# Altium PCB Extruder.PcbDoc
Units mm, origin at the board's own origin, x right, y up, seen from the top; angles counter-clockwise.
Board outline 78.23 x 77.34 mm, 2 copper layers (Top Layer, Bottom Layer); 31 components, 25 nets, 105 pads, 2 vias.
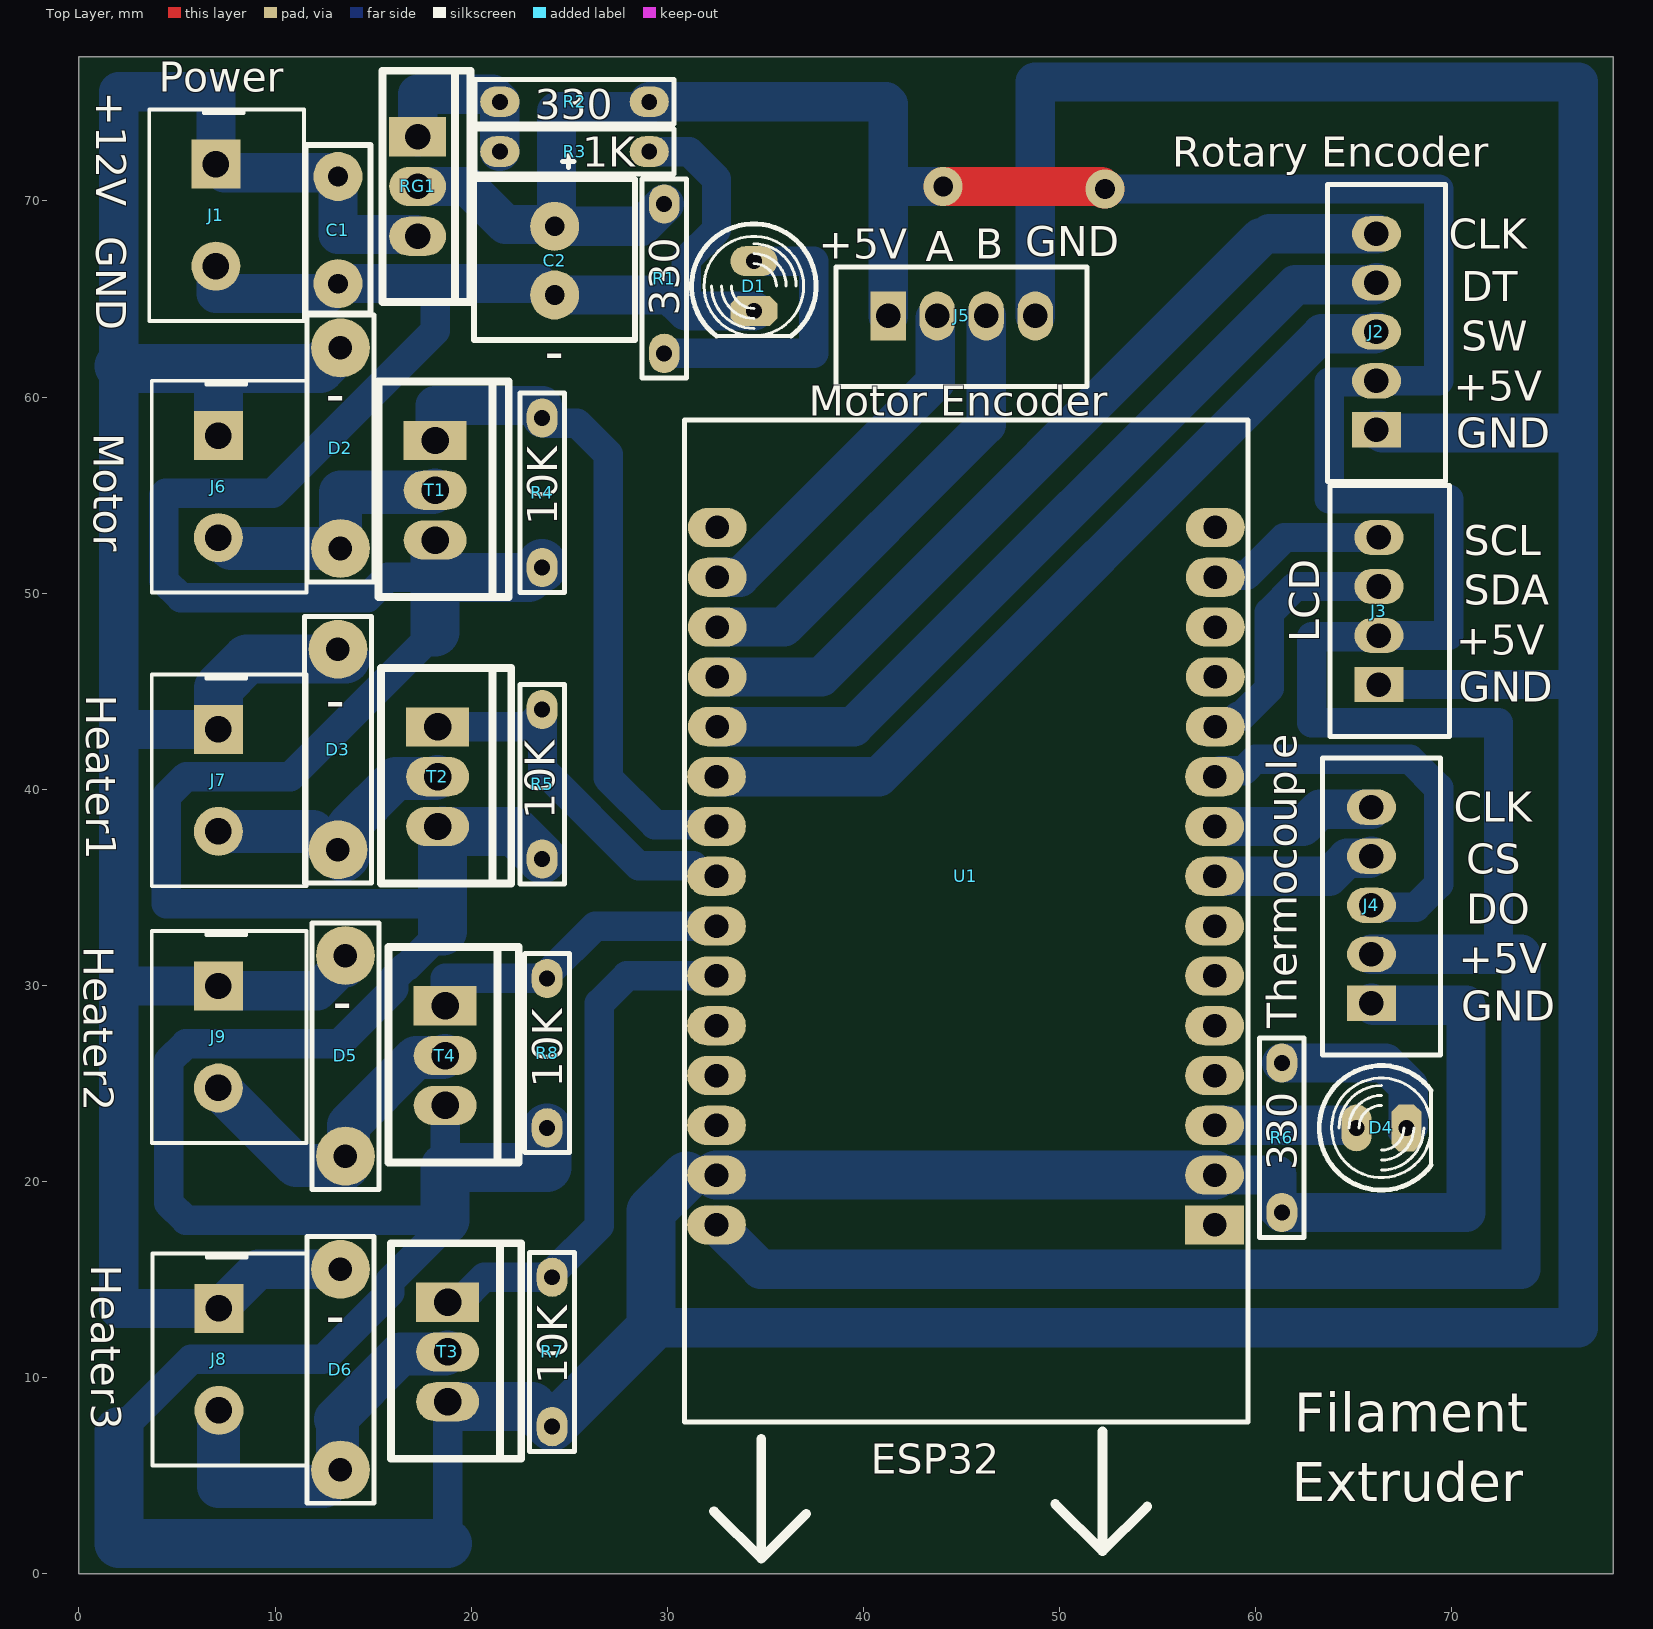
[diagram p0: Top Layer view]
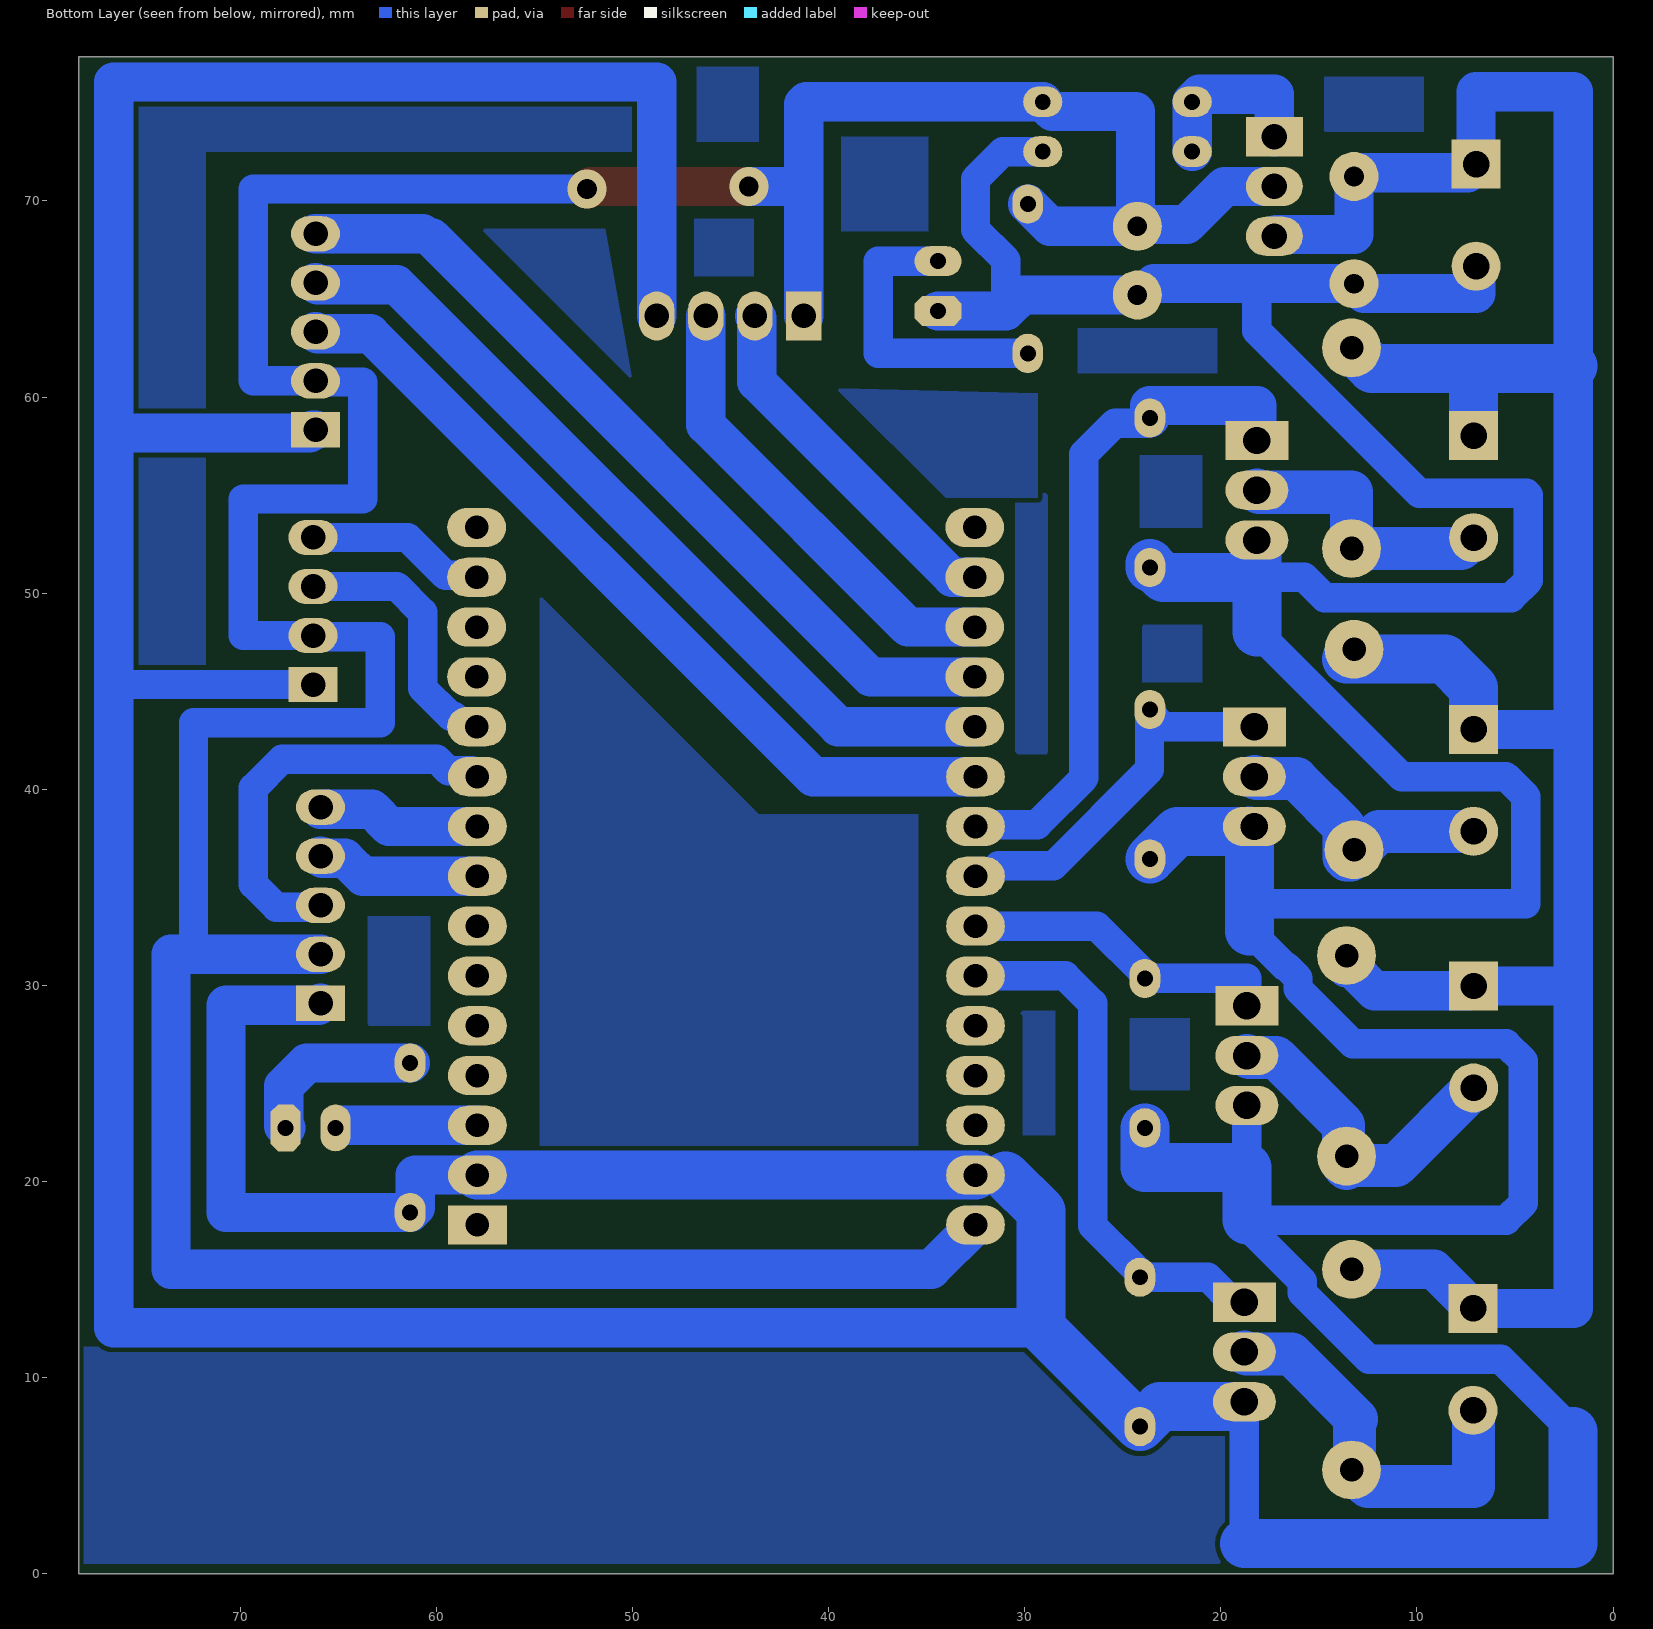
[diagram p1: Bottom Layer view, seen from below]

## Layer stack, top to bottom
Top Solder: solder mask 0.0102, Solder Resist, Dk 3.5
Top Layer: signal copper 0.0356
Dielectric 1: dielectric 0.32, FR-4, Dk 4.8
Bottom Layer: signal copper 0.0356
Bottom Solder: solder mask 0.0102, Solder Resist, Dk 3.5

## Board outline
0,0 78.232,0 78.232,77.343 0,77.343

## Design rules (kind name [scope] priority, off if disabled: settings)
Clearance [All] p1: gap=0.254 ignorepadtopadclearanceinfootprint=FALSE except(0: Arc-Hole Track-Hole SMDPad-Hole THPad-Hole Via-Hole Fill-Hole Poly-Hole Region-Hole Text-Hole)
PolygonConnect [All] p1: connectstyle=Relief reliefconductorwidth=0.254 reliefentries=4 polygonreliefangle="90 Angle" airgapwidth=0.254
RoutingVias [All] p1: holewidth=0.711 width=1.27 viastyle="Through Hole" minholewidth=0.711 minwidth=1.27 maxholewidth=0.711 maxwidth=1.27
SolderMaskExpansion [All] p1: expansion=0.102
Width [All] p1: maxlimit=3 minlimit=1 preferedwidth=1.5 minimp=50.000000 maximp=50.000000 favimp=50.000000
30 further rules are at their usual default settings.

## Components (designator, comment, footprint, x,y, rotation, side; value= is the part's Value field where it differs from the comment)
C1 "100nF" "CAP non" 13.208,68.666 r270 top
C2 "1uF" "CAP  pol" 24.357,67.207 r270 top
D1 "LED" "LED-05 R" 34.417,65.659 r270 top
D2 "1N4007" DO-41 13.335,57.277 r90 top
D3 "1N4007" DO-41 13.208,41.91 r90 top
D4 "LED" "LED-05 R" 66.421,22.733 r0 top
D5 "1N4007" DO-41 13.589,26.289 r90 top
D6 "1N4007" DO-41 13.335,10.287 r90 top
J1 "Power" CON 7.085,69.275 r270 top
J2 "Rotary Encoder" "Data Connnector 5 pins" 66.167,64.576 r180 top
J3 "LCD" "Data Connnector 4 pins" 66.294,51.589 r180 top
J4 "Thermocouple" "Data Connnector 5 pins" 65.913,35.333 r180 top
J5 "Motor Encoder" "Data Connnector 4 pins" 47.518,64.135 r90 top
J6 "Motor" CON 7.212,55.432 r270 top
J7 "Heater1" CON 7.212,40.453 r270 top
J8 "Heater3" CON 7.239,10.922 r270 top
J9 "Heater2" CON 7.212,27.365 r270 top
R1 "330" Resistor 29.845,66.04 r90 top
R2 "330" Resistor 25.273,75.057 r180 top
R3 "1K" Resistor 25.273,72.517 r180 top
R4 "10K" Resistor 23.622,55.118 r90 top
R5 "10K" Resistor 23.622,40.259 r90 top
R6 "330" Resistor 61.341,22.225 r90 top
R7 "10K" Resistor 24.13,11.303 r90 top
R8 "10K" Resistor 23.876,26.543 r90 top
RG1 "Adjustable Voltage Regulator" Regulator 17.272,73.279 r0 top
T1 "MOSFET" IRF540 18.161,57.785 r0 top
T2 "MOSFET" IRF540 18.288,43.18 r0 top
T3 "MOSFET" IRF540 18.796,13.843 r0 top
T4 "MOSFET" IRF540 18.669,28.956 r0 top
U1 "ESP32" ESP32 57.912,17.78 r180 top

## Footprints (in the part's own frame and the unit in brackets; to place one, negate y for a bottom-side part, rotate by r counter-clockwise, add the part's x,y. Pads: shape width x height; smd on the part's side, far side on the other; paste and mask are expansions set on the pad)
"CAP  pol" [mm]
  round 2.5 hole 1: 1(-1.5,-0.1) 2(2,-0.1)
  silkscreen extent -5.1,-4.2 4.3,4, body extent -3.8,-4.1 4.2,3.9, height 7
"CAP non" [mm]
  round 2.5 hole 1: 1(-2.581,0) 2(2.88,0)
  silkscreen extent -4.2,-1.65 4.4,1.65, body extent -2.79,-1.3 3.21,1.3, height 5.2
CON [mm]
  rect 2.5x2.5 hole 1.35: 1(-2.6,-0.1)
  round 2.5 hole 1.35: 2(2.6,-0.1)
  silkscreen extent -5.4,-3.5 5.4,4.4, body extent -5.08,-3.3 5.08,4.2, height 10
"Data Connnector 4 pins" [mm]
  rect 2.5x1.8 hole 1.25: 1(0,6.25)
  oval 2.5x1.8 hole 1.25: 2(0,3.75) 3(0,1.25) 4(0,-1.25)
  silkscreen extent -3.6,-3.9 2.5,8.9, body extent -3.45,-3.7 2.3,8.7, height 6.91
"Data Connnector 5 pins" [mm]
  rect 2.5x1.8 hole 1.25: 1(0,6.25)
  oval 2.5x1.8 hole 1.25: 2(0,3.75) 3(0,1.25) 4(0,-1.25) 5(0,-3.75)
  silkscreen extent -3.52,-6.26 2.5,8.88, body extent -3.39,-6.16 2.37,8.74, height 7.01
DO-41 [mm] "Diode, Axial; Body 5.2 x 2.7 mm (LxDia. max), Lead Dia. 0.86 mm (max)"
  round 3 hole 1.2: 1(-5,0) 2(5.23,0)
  silkscreen extent -6.7,-1.7 6.9,1.7, body extent -5.36,-1.27 5.56,1.3, height 2.55
ESP32 [mm]
  rect 3x2 hole 1.2: 1(0,0)
  oval 3x2 hole 1.2: 2(0,-2.54) 3(0,-5.08) 4(0,-7.62) 5(0,-10.16) 6(0,-12.7) 7(0,-15.24) 8(0,-17.78) 9(0,-20.32) 10(0,-22.86) 11(-0.04,-25.41) 12(-0.04,-27.95) 13(-0.04,-30.49) 14(-0.04,-33.03) 15(-0.04,-35.57) 16(25.36,-35.57) 17(25.36,-33.03) 18(25.36,-30.49) 19(25.36,-27.95) 20(25.36,-25.41) 21(25.4,-22.86) 22(25.4,-20.32) 23(25.4,-17.78) 24(25.4,-15.24) 25(25.4,-12.7) 26(25.4,-10.16) 27(25.4,-7.62) 28(25.4,-5.08) 29(25.4,-2.54) 30(25.4,0)
  silkscreen extent -1.7,-41.05 27.03,10.06, body extent -1.58,-40.97 26.92,9.96, height 15.2
IRF540 [mm]
  rect 3.2x2 hole 1.4: 1(0,0)
  oval 3.2x2 hole 1.4: 2(0,-2.54) 3(0,-5.08)
  silkscreen extent -2.89,-7.99 3.76,3, body extent -2.79,-7.86 3.62,2.81, height 22.92
"LED-05 R" [mm] "Light emitting diode dia 5mm red color"
  oct 1.524x2.4 hole 0.813: 1(1.27,0)
  oval 1.524x2.4 hole 0.813: 2(-1.27,0)
  silkscreen extent -3.17,-3.17 2.54,3.17, body extent -2.98,-3.01 2.44,3.01, height 12.31
Regulator [mm]
  rect 2.9x2 hole 1.3: 1(0,0)
  oval 2.9x2 hole 1.3: 2(0,-2.54) 3(0,-5.08)
  silkscreen extent -1.8,-8.44 2.7,3.36, body extent -1.75,-8.48 2.65,3.4, height 20.11
Resistor [mil]
  oval 78.74x62 hole 32: 1(-150,0) 2(150,0)
  silkscreen extent -200,-45 200,45, body extent -159,-39 159,39, height 79

## Part data
C1: library part "Cap non"
C2: library part "Cap pol"
D2 D3 D5 D6: library part Diode
J1 J6 J7 J8 J9: library part 1935161, "Conn Terminal Blocks 2 POS 5mm Solder ST Thru-Hole 16A", Color=Green, Current=18A, Current Rating=17.5A, Flammability Rating="UL94 V-0", Manufacturer 1="Phoenix Contact", Max Current Rating=16A, Max Supply Voltage=250V, Package Quantity=250, Supplier Part Number 1=277-1667-ND, Voltage=300V, Voltage Rating (DC)=320V, Approvals=UL, ComponentLink1Description=https://datasheet.ciiva.com/15169/getdatasheetpartid-177903-15169663.pdf?src-supplier=Verical, ComponentLink1URL=https://datasheet.ciiva.com/15169/getdatasheetpartid-177903-15169663.pdf?src-supplier=Verical, ComponentLink2Description=https://datasheet.ciiva.com/16047/1935161-16047247.pdf?src-supplier=Onlinecomponents.com, ComponentLink2URL=https://datasheet.ciiva.com/16047/1935161-16047247.pdf?src-supplier=Onlinecomponents.com, ComponentLink3Description=https://datasheet.ciiva.com/824/combiconcompact5-0mmseries-824222.pdf?src-supplier=Digi-Key, ComponentLink3URL=https://datasheet.ciiva.com/824/combiconcompact5-0mmseries-824222.pdf?src-supplier=Digi-Key, Connector Type=Screw, Contact Material=Copper,Tin, Depth=9mm, Height=11.3mm, Housing Color=Green, Housing Material=Polyamide, Insulation Material=Nylon, Lead Free="Lead Free", Length=9mm, Manufacturer Part Number 1=1935161, Material=Nylon, Mount="Through Hole", Number of Circuits=2, Number of Contacts=2, Number of Levels=1, Number of Pins=2, Number of Poles=2, Number of Positions=2, Number of Positions Per Level=2, Number of Rows=1, Orientation=Straight, Packaging=Bulk, Pitch=5mm, Pricing 1="1=0.43000, 10=0.41100, 50=0.39280, 100=0.38200, 250=0.35700, 500=0.32844, 1000=0.30350 (USD)", Radiation Hardening=No, REACH SVHC=Unknown, RoHS=Yes, Stock 1=59845, Supplier 1=Digi-Key, Termination=Solder, Voltage Rating=250V, Weight=0.067021oz, Width=14.9mm, Wire/Cable Gauge=26AWG, Wire Gauge (Max)=26AWG, Wire Gauge (Min)=12AWG
J2 J4: library part "Data Connector 5 pins"
J3 J5: library part "Data Connector 4 pin"
R1 R2 R3 R4 R5 R6 R7 R8: library part Resistor
RG1: library part LM350
T1 T2 T3 T4: library part IRF540

## Via types
v1: diameter 2, hole 1, Top Layer to Bottom Layer, 2 vias

## Nets (pads, with @x,y where several pads share a name; then routed paths per layer and width w, separated by ;. In a path a pad name is that pad's centre, name@x,y a point inside that pad or via, vN(x,y) a via of type N, cw(c..) or ccw(c..) an arc to the next point about the centre after c; other vN are vias at no path point)
+5V: C2.1 J2.2 J3.2 J4.2 J5.1 R1.2 R2.1 RG1.2 U1.30 | length 208.7
  Top Layer w2: v1(44.069,70.739) 52.143,70.739 52.27,70.612 v1(52.324,70.612)
  Bottom Layer w1.5: v1(52.324,70.612) 69.342,70.612 69.342,60.826 J2.2 66.11,60.769 63.754,60.769 63.754,54.8 69.85,54.8 69.85,47.839 J3.2 66.237,47.782 62.865,47.782 62.865,43.384 72.39,43.384 72.39,31.583
  Bottom Layer w2: RG1.2 19.812,70.739 21.748,68.803 24.161,68.803 C2.1 ; R1.2 28.702,68.707 C2.1 ; U1.30 34.766,15.526 73.533,15.526 73.533,31.583 72.39,31.583 J4.2 ; J5.1 41.268,70.739 ; v1(44.069,70.739) 41.268,70.739 ; C2.1 24.353,68.803 24.353,74.558 28.584,74.558 R2.1 41.148,75.057 41.268,74.937 41.268,70.739
+12V: C1.1 D2.2 D3.2 D5.2 D6.2 J1.1 J6.1 J7.1 J8.1 J9.1 RG1.3 | length 139
  Bottom Layer w2: J7.1 2.032,43.053 ; D5.2@13.589,30.884 D5.2@13.318,30.884 ; D6.2@13.716,15.517 D6.2 9.134,15.517 J8.1 2.032,13.522 2.032,29.965 ; D5.2@13.771,31.337 D5.2@13.318,30.884 ; RG1.3 17.176,68.295 13.208,68.295 C1.1 13.017,71.438 7.422,71.438 J1.1 6.985,75.565 2.032,75.565 2.032,61.595 2.032,43.053 ; 2.032,29.965 2.032,43.053 ; 2.032,29.965 J9.1 7.359,29.718 12.152,29.718 D5.2@13.318,30.884
  Bottom Layer w2.5: 2.032,61.595 2.159,61.468 7.112,61.468 ; J7.1 7.112,45.168 8.576,46.632 D3.2@13.589,46.632 ; J6.1 7.112,61.468 ; D2.2 12.296,61.468 7.112,61.468
Channel_A: J5.2 U1.17 | length 18.6
  Bottom Layer w2: U1.17 33.7,50.81 43.668,60.778 43.668,64.035 J5.2
Channel_B: J5.3 U1.18 | length 23.5
  Bottom Layer w2: U1.18 35.951,48.27 46.268,58.587 J5.3
CLK: J2.5 U1.19 | length 42.5
  Bottom Layer w2: U1.19 37.856,45.73 60.261,68.135 ; 60.706,68.326 J2.5
CS: J4.4 U1.8 | length 8.4
  Bottom Layer w2: U1.8 63.754,35.56 64.677,36.483 65.813,36.483 J4.4
DO: J4.3 U1.10 | length 21.3
  Bottom Layer w1.5: U1.10 58.208,40.936 59.386,40.936 59.979,41.529 67.878,41.529 69.342,40.065 69.342,35.155 68.17,33.983 66.013,33.983 J4.3
DT: J2.4 U1.20 | length 43
  Bottom Layer w2: U1.20 39.507,43.19 62.043,65.726 66.067,65.726 J2.4
GND: C1.2 C2.2 D1.1 J1.2 J2.1 J3.1 J4.1 J5.4 R3.1 R4.1 R5.1 R6.1 R7.1 R8.1 T1.3 T2.3 T3.3 T4.3 U1.2 U1.29 | length 487.1
  Bottom Layer w1.5: 2.032,7.239 5.715,10.922 12.446,10.922 15.839,14.315 15.839,14.906 18.669,17.736 ; 18.161,48.016 10.785,40.64 5.461,40.64 4.445,39.624 4.445,34.163 18.542,34.163 ; 18.161,50.8 15.743,50.8 14.716,49.773 5.197,49.773 4.318,50.652 4.318,54.991 4.413,55.086 9.874,55.086 18.161,63.373 18.161,65.786 ; T2.3 18.311,38.1 T2.3@18.542,37.869 ; 18.542,32.766 16.736,30.96 16.653,30.96 16.065,30.372 16.065,29.819 13.265,27.019 5.451,27.019 4.572,26.14 4.572,18.9 5.451,18.021 18.669,18.021 ; 18.669,20.701 T4.3 ; 18.796,1.524 T3.3 ; R3.1 29.097,72.503 31.129,72.503 32.512,71.12 32.512,68.527 30.967,66.982 30.967,64.389 ; J3.1 75.899,45.339 76.454,44.784
  Bottom Layer w2: J1.2 6.985,65.278 12.7,65.278 C1.2 18.161,65.786 C2.2@23.407,65.786 ; C2.2 30.149,65.207 30.967,64.389 D1.1 ; 29.178,12.541 76.454,12.541 76.454,44.784 76.454,58.166 ; J5.4 48.768,76.073 76.454,76.073 76.454,58.166 ; U1.2 61.087,20.32 61.087,18.669 R6.1 70.739,18.415 70.739,28.983 66.013,28.983 J4.1 ; J2.1 66.317,58.326 66.477,58.166 76.454,58.166
  Bottom Layer w2.5: 2.032,7.239 2.032,1.524 18.796,1.524 ; 18.161,48.016 18.161,50.8 ; T1.3@18.161,52.324 18.161,50.8 ; 18.542,32.766 18.542,34.163 T2.3@18.542,37.869 ; T2.3@18.638,37.85 22.221,37.85 R5.1 ; 18.669,18.021 18.669,20.701 23.876,20.701 R8.1 ; T3.3@19.146,8.513 23.11,8.513 R7.1 29.178,12.541 29.178,18.487 30.975,20.284 ; R4.1 23.622,51.5 22.922,50.8 18.161,50.8 ; U1.29 U1.2
H1: R5.2 T2.1 U1.23 | length 20
  Bottom Layer w1.5: T2.1 22.925,43.18 23.622,43.877 R5.2 23.636,44.055 23.636,41.007 28.547,36.096 31.341,36.096 31.877,35.56 U1.23
H2: R8.2 T4.1 U1.24 | length 16.5
  Bottom Layer w1.5: T4.1 18.669,30.353 R8.2 23.876,30.566 26.33,33.02 U1.24
H3: R7.2 T3.1 U1.25 | length 27.4
  Bottom Layer w1.5: T3.1 19.396,13.843 20.666,15.113 R7.2 24.13,15.326 26.543,17.739 26.543,29.083 27.94,30.48 U1.25
M1: R4.2 T1.1 U1.22 | length 35.2
  Bottom Layer w1.5: R4.2 23.622,58.736 23.657,58.701 23.849,58.701 23.876,58.674 25.4,58.674 26.987,57.087 26.987,40.576 29.368,38.196 32.416,38.196 U1.22
  Bottom Layer w2: T1.1 18.161,59.563 23.622,59.563 R4.2
NetD1_2: D1.2 R1.1 | length 15.4
  Bottom Layer w1.5: R1.1 37.465,62.23 37.465,66.929 D1.2
NetD4_1: D4.1 R6.2 | length 9.1
  Bottom Layer w2: R6.2 66.612,26.035 67.784,24.863 67.784,22.826 D4.1
NetD4_2: D4.2 U1.3 | length 7
  Bottom Layer w2: U1.3 D4.2@64.897,22.86
NetR2_2: R2.2 R3.2 RG1.1 | length 9
  Bottom Layer w2: RG1.1 17.272,75.438 21.082,75.438 R2.2 R3.2
Out_H1: D3.1 J7.2 T2.2 | length 14.5
  Bottom Layer w2.2: J7.2 11.922,37.853 13.227,36.548 13.373,36.402 13.589,36.402 13.716,36.529 13.716,37.037 13.716,38.1 16.156,40.54 18.188,40.54 T2.2
Out_H2: D5.1 J9.2 T4.2 | length 16.9
  Bottom Layer w2.2: J9.2 11.07,20.807 13.436,20.807 13.589,20.654 13.742,20.807 13.742,22.878 17.18,26.316 18.569,26.316 T4.2
Out_H3: D6.1 J8.2 T3.2 | length 20.3
  Bottom Layer w2.2: J8.2@7.187,8.322 J8.2 7.112,8.295 7.112,4.445 12.493,4.445 D6.1 13.182,5.44 13.182,7.773 13.081,7.874 16.41,11.203 18.696,11.203 T3.2
Out_M: D2.1 J6.2 T1.2 | length 14.2
  Bottom Layer w2.2: J6.2 7.193,52.832 7.748,52.277 D2.1 13.335,55.145 18.061,55.145 T1.2
SCL: J3.4 U1.14 | length 9.2
  Bottom Layer w1.5: U1.14 58.048,50.906 59.542,50.906 61.475,52.839 J3.4
SCLK: J4.5 U1.9 | length 8.4
  Bottom Layer w2: U1.9 62.412,38.1 63.295,38.983 J4.5@65.913,38.983
SDA: J3.3 U1.11 | length 13.6
  Bottom Layer w1.5: U1.11 58.587,43.19 59.123,43.726 59.282,43.726 60.706,45.15 60.706,49.022 62.023,50.339 J3.3
SW: J2.3 U1.21 | length 43.1
  Bottom Layer w2: U1.21 40.791,40.64 63.377,63.226 66.067,63.226 J2.3
pads on no net: U1.1 U1.4 U1.5 U1.6 U1.7 U1.12 U1.13 U1.15 U1.16 U1.26 U1.27 U1.28

## Polygon pours and split planes (outlines as drawn)
no net on Bottom Layer (solid, pour order 38): 28.448,22.352 28.448,28.702 30.099,28.702 30.226,28.575 30.099,28.448 30.099,22.352
no net on Bottom Layer (solid, pour order 36): 60.325,27.94 60.325,33.528 63.5,33.528 63.5,28.067 63.627,27.94
no net on Bottom Layer (solid, pour order 34): 21.59,28.321 21.59,24.638 24.765,24.638 24.638,24.765 24.638,28.321
no net on Bottom Layer (solid, pour order 32): 20.955,48.387 20.955,45.466 24.003,45.466 24.003,48.26 24.13,48.387
no net on Bottom Layer (solid, pour order 30): 20.955,53.34 20.955,57.023 24.13,57.023 24.13,53.34
no net on Bottom Layer (solid, pour order 28): 28.702,41.783 28.829,41.91 28.829,54.991 28.956,55.118 30.48,55.118 30.48,41.91 30.353,41.783
no net on Bottom Layer (solid, pour order 26): 20.193,61.214 20.193,63.5 27.305,63.5 27.305,61.214
no net on Bottom Layer (solid, pour order 20): 9.652,73.533 9.652,76.327 14.732,76.327 14.732,73.66 14.859,73.533
no net on Bottom Layer (solid, pour order 18): 51.391,68.58 49.994,60.833 57.741,68.58
no net on Bottom Layer (solid, pour order 16): 43.815,69.088 43.815,66.167 46.863,66.167 46.863,69.088
no net on Bottom Layer (solid, pour order 14): 43.561,73.025 43.561,76.835 46.736,76.835 46.736,73.025
no net on Bottom Layer (solid, pour order 12): 34.925,68.453 34.925,73.279 39.37,73.279 39.37,68.453
no net on Bottom Layer (solid, pour order 10): 29.337,60.198 29.337,54.864 34.036,54.864 39.624,60.452
GND on Bottom Layer (solid, pour order 0): 18.161,0.508 18.161,8.763 27.305,8.763 30.099,11.557 77.978,11.557 77.978,0.508
GND on Bottom Layer (solid, pour order 8): 49.784,72.517 75.057,72.517 75.057,75.819 49.784,75.819
GND on Bottom Layer (solid, pour order 6): 71.755,45.466 71.882,45.339 76.581,45.339 76.581,75.438 71.755,75.438
GND on Bottom Layer (solid, pour order 4): 35.433,38.735 35.433,21.209 54.483,21.209 54.737,21.463 54.737,49.911 43.561,38.735

## Silkscreen, mask and mechanical layers (free items; w line width, h text height)
Top Overlay:
  lines w0.4: 19.177,64.897 19.177,76.454 ; 21.082,35.369 21.082,46.164 ; 21.082,49.911 21.082,60.706 ; 21.336,21.018 21.336,31.813 ; 21.463,6.032 21.463,16.828
  lines w0.5: 32.385,3.175 34.798,0.762 ; 34.798,6.858 34.798,0.762 ; 37.084,3.048 34.798,0.762 ; 49.784,3.556 52.197,1.143 ; 52.197,7.239 52.197,1.143 ; 54.483,3.429 52.197,1.143
  text "+12V" at 0.889,75.565 h1.52 r270
  text "GND" at 0.889,68.199 h1.52 r270
  text "CLK" at 69.85,67.564 h1.52
  text "GND" at 48.26,67.183 h1.52
  text "+5V" at 37.719,67.056 h1.52
  text "B" at 45.72,67.056 h1.52
  text "A" at 43.18,66.929 h1.52
  text "DT" at 70.485,64.897 h1.52
  text "SW" at 70.485,62.357 h1.52
  text "-" at 23.749,61.341 h2
  text "+5V" at 70.104,59.817 h1.52
  text "-" at 12.573,59.182 h2
  text "GND" at 70.231,57.404 h1.52
  text "SCL" at 70.612,51.943 h1.52
  text "SDA" at 70.612,49.403 h1.52
  text "+5V" at 70.231,46.863 h1.52
  text "GND" at 70.358,44.45 h1.52
  text "-" at 12.573,43.561 h2
  text "CLK" at 70.104,38.354 h1.52
  text "CS" at 70.739,35.687 h1.52
  text "DO" at 70.739,33.147 h1.52
  text "+5V" at 70.358,30.607 h1.52
  text "-" at 12.954,28.194 h2
  text "GND" at 70.485,28.194 h1.52
  text "-" at 12.573,12.192 h2
  text "Filament" at 61.976,7.239 h2
  text "Extruder" at 61.849,3.683 h2